# Altium PCB PCB1.PcbDoc
Units mm, origin at the board's own origin, x right, y up, seen from the top; angles counter-clockwise.
Board outline 25 x 16 mm, 2 copper layers (Top Layer, Bottom Layer); 6 components, 6 nets, 20 pads, 0 vias.
Unrouted connection lines stored in the file: 11.
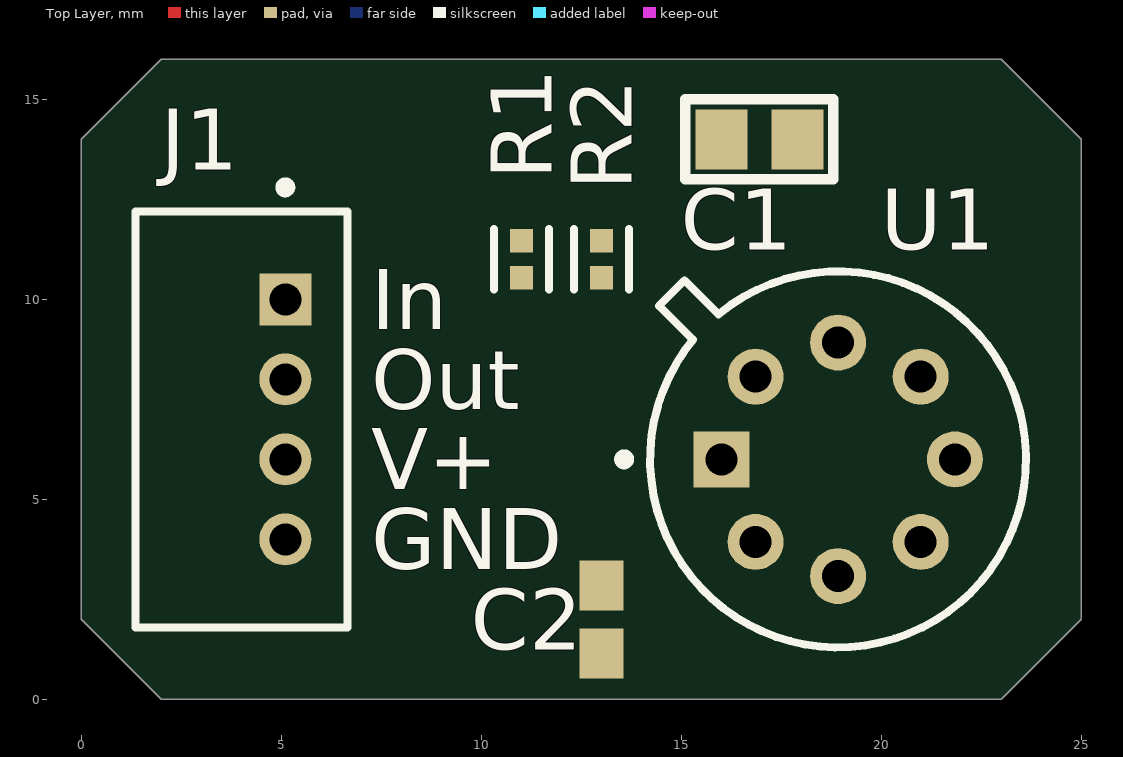
[diagram p0: Top Layer view]
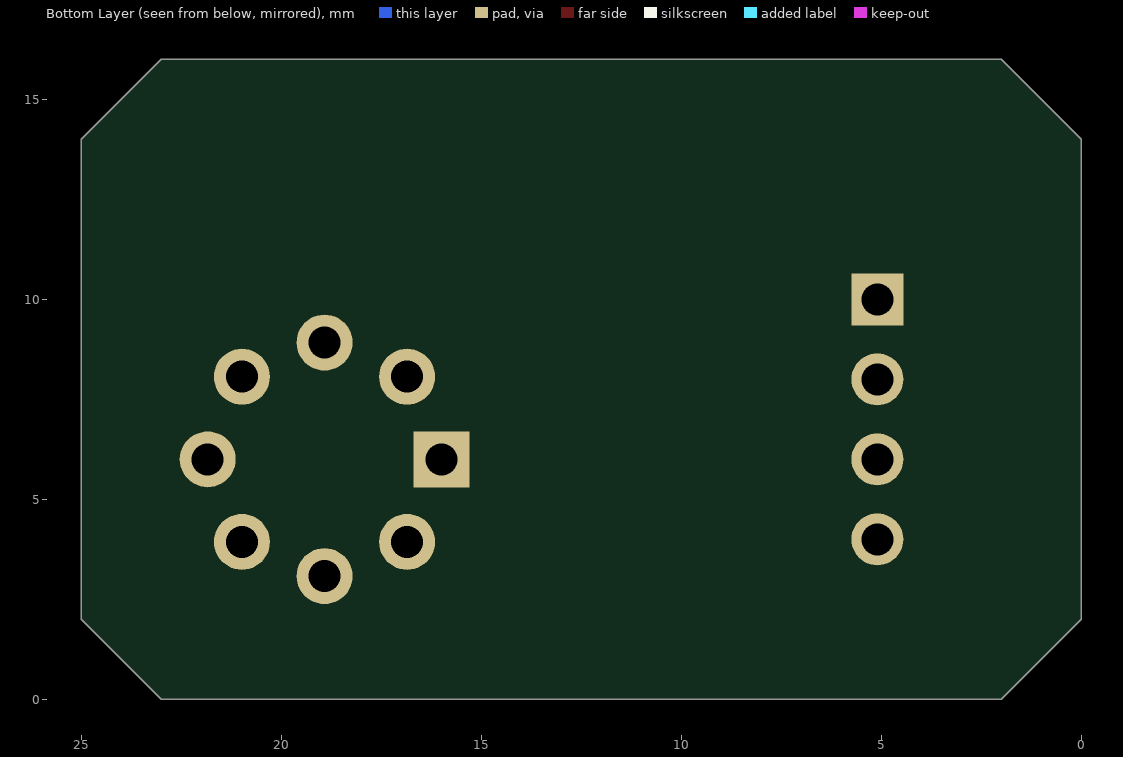
[diagram p1: Bottom Layer view, seen from below]

## Layer stack, top to bottom
Top Solder: solder mask 0.0102, Solder Resist, Dk 3.5
Top Layer: signal copper 0.0356
Dielectric 1: dielectric 0.32, FR-4, Dk 4.8
Bottom Layer: signal copper 0.0356
Bottom Solder: solder mask 0.0102, Solder Resist, Dk 3.5

## Board outline
2,0 0,2 0,14 2,16 23,16 25,14 25,2 24,1 23,0

## Design rules (kind name [scope] priority, off if disabled: settings)
Clearance [All] p1: gap=0.254 ignorepadtopadclearanceinfootprint=FALSE except(0: Arc-Hole Track-Hole SMDPad-Hole THPad-Hole Via-Hole Fill-Hole Poly-Hole Region-Hole Text-Hole)
PolygonConnect [All] p1: connectstyle=Relief reliefconductorwidth=0.254 reliefentries=4 polygonreliefangle="90 Angle" airgapwidth=0.254
RoutingVias [All] p1: holewidth=0.711 width=1.27 viastyle="Through Hole" minholewidth=0.711 minwidth=1.27 maxholewidth=0.711 maxwidth=1.27
SolderMaskExpansion [All] p1: expansion=0.102 istentingtop=FALSE
Width [All] p1: maxlimit=0.254 minlimit=0.254 preferedwidth=0.254
30 further rules are at their usual default settings.

## Components (designator, comment, footprint, x,y, rotation, side; value= is the part's Value field where it differs from the comment)
C1 "Cap_0805" C_0805 16.95,14 r0 top
C2 "06035A160JAT2A" CAPC1608X90X35ML15T15 13,2 r90 top
J1 "DF3A-4P-2DSA" FP-DF3A-4P-2DSA-MFG 4,7 r90 top
R1 "RG1005P-393-B-T5" FP-RG1005-IPC_B 11,11 r90 top
R2 "RG1005P-393-B-T5" FP-RG1005-IPC_B 13,11 r270 top
U1 "LM741H" LMC0008A 18.92,6 r0 top

## Footprints (in the part's own frame and the unit in brackets; to place one, negate y for a bottom-side part, rotate by r counter-clockwise, add the part's x,y. Pads: shape width x height; smd on the part's side, far side on the other; paste and mask are expansions set on the pad)
C_0805 [mm]
  rect 1.3x1.5 smd: 1(-0.95,0) 2(0.95,0)
  silkscreen extent -1.85,-1 1.85,1, body extent -1,-0.63 1,0.63, height 0.65
CAPC1608X90X35ML15T15 [mm] "Chip Capacitor, 2-Leads, Body 1.60x0.81mm, IPC Low Density"
  rect 1.25x1.1 smd: 1(-0.85,0) 2(0.85,0)
  body extent -0.88,-0.48 0.87,0.48, height 0.9
FP-DF3A-4P-2DSA-MFG [mm]
  rect 1.3x1.3 hole 0.8 paste-2539.97 mask+0: 1(3,-1.1)
  round 1.3 hole 0.8 paste-2539.97 mask+0: 2(1,-1.1) 3(-1,-1.1) 4(-3,-1.1)
  silkscreen extent -5.2,-2.65 5.92,2.65, body extent -5.3,-2.75 5.3,2.75, height 0.25
FP-RG1005-IPC_B [mm]
  rect 0.589x0.572 smd paste+0 mask+0: 1(-0.464,0) 2(0.464,0)
  silkscreen extent -0.76,-0.69 0.76,0.69, body extent -0.91,-0.44 0.91,0.44, height 0.25
LMC0008A [mm] "Can, 8-Leads, Pin Circle Dia. 5.84mm, Lead Dia. 0.48mm (max)"
  rect 1.4x1.4 hole 0.8: 1(-2.92,0)
  round 1.4 hole 0.8: 2(-2.065,-2.065) 3(0,-2.92) 4(2.065,-2.065) 5(2.92,0) 6(2.065,2.065) 7(0,2.92) 8(-2.065,2.065)
  silkscreen extent -5.47,-4.7 4.7,4.7, body extent -4.7,-4.7 4.7,4.7, height 5.08

## Part data
C2: library part CMP-2006-04247-1, Manufacturer="AVX Interconnect / Elco", Part Number=06035A160JAT2A
J1: library part CMP-11610-000039-1, "CONN HEADER VERT 4POS 2MM", Color=Black, Current Rating=3A, Insulation Resistance=1GR, Package Quantity=100, Voltage Rating=250V, Connector Type="Male Pin", Contact Gender=Male, Contact Material=Brass, Contact Plating=Tin, Contact Type="Male Pin", Gender=Male, Height=5mm, Housing Color=Black, Housing Material=Polyamide, Insulation Material=Nylon, Lead Free="Lead Free", Length=10mm, Mount="Through Hole", Number of Contacts=4, Number of Positions=4, Number of Rows=1, Orientation=Straight, Packaging=Bulk, Pitch=2mm, Radiation Hardening=No, RoHS Compliant=Yes, Series=DF3, Termination="Through Hole"
R1 R2: library part CMP-2002-01450-2, "Automotive Metal Thin Film Chip Resistor, 0402, 39kΩ, 0.1%, 25ppm/°C, 0.0625W, 75V", Case Code (Imperial)=0402, Case Code (Metric)=1005, Max Operating Temperature=155°C, Max Power Dissipation=63mW, Min Operating Temperature=-55°C, Resistance=39kR, Resistance Tolerance=0.1%, Resistor Type="Thin Film", Temperature Coefficient=25ppm/°C, Voltage Rating=75V, Voltage Rating (DC)=25V, Case/Package=0402, Features="Automotive AEC-Q200", Height=0.35mm, Lead Free="Lead Free", Length=1mm, Number of Pins=2, Number of Terminations=2, Packaging="Tape and Reel", Power Rating=63mW, RoHS Compliant=Yes, Series=RG, Size Code=0402, Termination=SMD/SMT, Tolerance=0.1%, Weight=2.3E-05oz, Width=0.5mm
U1: library part CMP-0055-00031-3, "Operational Amplifier, 8-pin TO-99", Manufacturer="Texas Instruments", Package Reference=LMC0008A, PackageTopMarking="NSZXYTTE# LM741H", PowerWise=N, Code_JEDEC=TO-99, ComponentLink1Description="Datasheet URL", ComponentLink1URL=http://www.ti.com/general/docs/lit/getliterature.tsp?genericPartNumber=LM741&fileType=pdf, CompType=Amplifiers, PackageDescription="Metal Can, TO-99, 8 Lead, .200 Dia., P.C.", PinCount=8, RoHS=N

## Nets (pads, with @x,y where several pads share a name; then routed paths per layer and width w, separated by ;. In a path a pad name is that pad's centre, name@x,y a point inside that pad or via, vN(x,y) a via of type N, cw(c..) or ccw(c..) an arc to the next point about the centre after c; other vN are vias at no path point)
NetC1_1: C1.1 R1.2 R2.1
NetC1_2: C1.2 J1.2 U1.2 U1.6
NetC2_1: C2.1 J1.4 U1.4
NetC2_2: C2.2 R2.2 U1.3
NetJ1_1: J1.1 R1.1
NetJ1_3: J1.3 U1.7
pads on no net: U1.1 U1.5 U1.8

## Silkscreen, mask and mechanical layers (free items; w line width, h text height)
Top Overlay:
  text "In" at 7.254,9.254 h1.5
  text "Out" at 7.254,7.254 h1.5
  text "V+" at 7.254,5.254 h1.52
  text "GND" at 7.254,3.254 h1.52
Mechanical 1:
  lines w0.254: 0,2 0,14 2,16 23,16 25,14 25,6 25,2 24,1 23,0 2,0 0,2